# EAGLE board testing_jig (EAGLE 9.7.0)
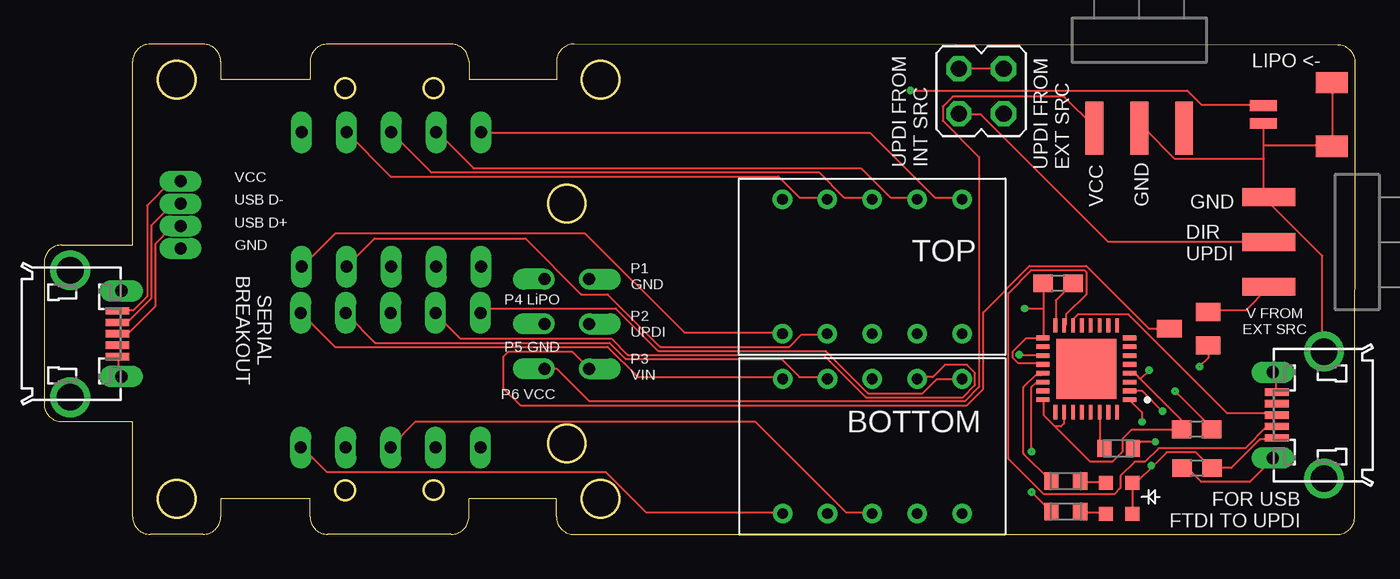
[diagram p0: board, top side]
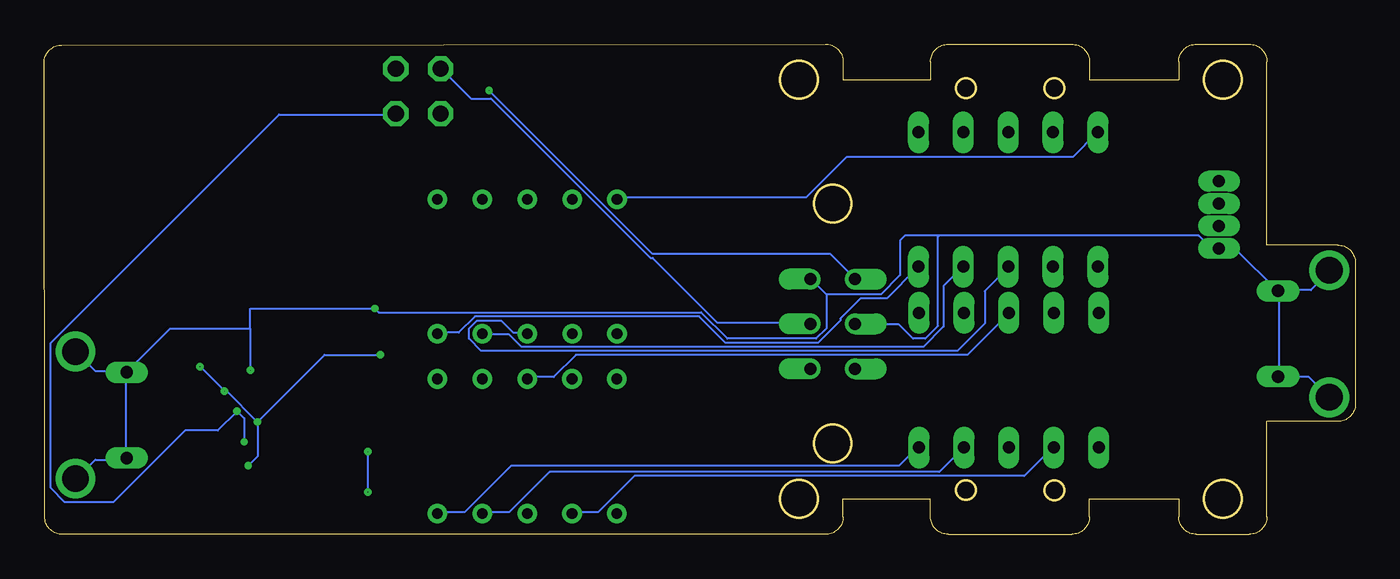
[diagram p1: board, bottom side, seen from below]

Size 74.22 x 27.77 mm. Coordinates in mm from the lower left corner, seen from the top.
Outline: 30,0 73.18,0 arc90 74.18,1 74.22,26.71 arc90 73.22,27.71 30,27.77 arc90 29,26.77 29,25.76 24.05,25.76 24.05,26.76 arc90 23.05,27.76 16.05,27.76 arc90 15.05,26.76 15.05,25.75 10,25.75 10,26.76 arc90 9,27.76 6,27.76 arc90 5,26.76 5,16.39 1,16.39 arc90 0,15.39 0,7.39 arc90 1,6.39 5,6.39 5,1.01 arc90 6,0.01 9,0.01 arc90 10,1.01 10,2.01 15.05,2.01 15.05,1.01 arc90 16.05,0.01 23.05,0.01 arc90 24.05,1.01 24.05,2.01 29,2.01 29,1 arc90 30,0
Outline: circle at 17.05,25.26 radius 0.55
Outline: circle at 29.58,5.15 radius 1.05
Outline: circle at 7.5,25.76 radius 1.05
Outline: circle at 31.5,25.76 radius 1.05
Outline: circle at 29.58,18.73 radius 1.05
Outline: circle at 31.5,2.01 radius 1.05
Outline: circle at 7.5,2.01 radius 1.05
Outline: circle at 22.05,2.51 radius 0.54
Outline: circle at 17.05,2.51 radius 0.55
Outline: circle at 22.05,25.26 radius 0.55
Copper layers (1*16): Top / Bottom
Stack-up Default Layer Stack: Top User Defined 0.035mm / Dielectric-1 User Defined 1.5mm / Bottom User Defined 0.035mm
Design rules "watch": minimum track width 4mil, minimum drill 0.008890625mm, track to track 5mil, track to pad 5mil, pad to pad 5mil, via to via 5mil, smd to smd 5mil, copper to edge 2.5mil, drill to drill 5mil, minimum pad ring 10mil, minimum via ring 8mil, stop-mask expansion 4mil, vias tented up to drill 0.008890625mm, thermal gap 10mil

## Footprints (pad centres in the part's own frame; a part is rotated, then mirrored left to right if it is on the bottom)
2_DIGIT_0.28" = drill 0.6: _1 -5.08,-3.81; _2 -2.54,-3.81; _3 0,-3.81; _4 2.54,-3.81; _5 5.08,-3.81; _6 5.08,3.81; _7 2.54,3.81; _8 0,3.81; _9 -2.54,3.81; _10 -5.08,3.81
0603CAP = smd 1.1 x 1: 1 -0.85,0; 2 0.85,0
3PIN__SMT_MALE = smd 1 x 3: 1 -2.54,5; 2 0,5; 3 2.54,5
SOT23 = smd 1 x 1.4: 1 -0.95,-1.1; 2 0.95,-1.1; 3 0,1.1
JST-SM02B-SRSS-TB = smd 0.6 x 1.55: 1 0.5,0; 2 -0.5,0 | smd 1.2 x 1.8: M1 1.8,3.875; M2 -1.8,3.875
RESC1608X60 = smd 0.799 x 0.974: 1 -0.815,0; 2 0.815,0
ZX62D-B-5PA8 = smd 1.35 x 0.4: 1 4.825,1.3; 2 4.825,0.65; 3 4.825,0; 4 4.825,-0.65; 5 4.825,-1.3 | drill 1.5: S1 2.15,-3.6; S2 2.15,3.6 | drill 0.7 long: S3 5.05,2.425; S4 5.05,-2.425
QFN50P500X500X90-33N = smd 0.81 x 0.27: 1 -2.45,1.75; 2 -2.45,1.25; 3 -2.45,0.75; 4 -2.45,0.25; 5 -2.45,-0.25; 6 -2.45,-0.75; 7 -2.45,-1.25; 8 -2.45,-1.75; 17 2.45,-1.75; 18 2.45,-1.25; 19 2.45,-0.75; 20 2.45,-0.25; 21 2.45,0.25; 22 2.45,0.75; 23 2.45,1.25; 24 2.45,1.75 | smd 0.27 x 0.81: 9 -1.75,-2.45; 10 -1.25,-2.45; 11 -0.75,-2.45; 12 -0.25,-2.45; 13 0.25,-2.45; 14 0.75,-2.45; 15 1.25,-2.45; 16 1.75,-2.45; 25 1.75,2.45; 26 1.25,2.45; 27 0.75,2.45; 28 0.25,2.45; 29 -0.25,2.45; 30 -0.75,2.45; 31 -1.25,2.45; 32 -1.75,2.45 | smd 3.4 x 3.4: 33 0,0
2X3-P50-E2-POGOPINS = drill 0.68 offset: 1 -2.54,2.54; 2 -2.54,0; 3 -2.54,-2.54; 4 0,2.54; 5 0,0; 6 0,-2.54
1X4-1.27-P50-E2-POGOPINS = drill 0.68 pad 0.812 long: P$1 0,1.905; P$2 0,0.635; P$3 0,-0.635; P$4 0,-1.905
0603_LED = smd 0.8 x 0.8: A 0,-0.75; C 0,0.75
2X2PIN_JUMPER = drill 0.914 octagon: 1 -1.27,-1.27; 2 -1.27,1.27; 3 1.27,-1.27; 4 1.27,1.27
2X0.28_LED_DISP_POGO_PIN_HARNESS = drill 0.68 pad 0.98 long: BOT1 -5.12,-10.24; BOT2 -2.58,-10.24; BOT3 -0.04,-10.24; BOT4 2.5,-10.24; BOT5 5.04,-10.24; BOT6 5.04,-2.62; BOT7 2.5,-2.62; BOT8 -0.04,-2.62; BOT9 -2.58,-2.62; BOT10 -5.12,-2.62; TOP1 -5.08,0; TOP2 -2.54,0; TOP3 0,0; TOP4 2.54,0; TOP5 5.08,0; TOP6 5.08,7.62; TOP7 2.54,7.62; TOP8 0,7.62; TOP9 -2.54,7.62; TOP10 -5.08,7.62

## Placement (x,y rotation side)
BOTTOM  0.28"-2DIGIT-7SEGEMNT  [2_DIGIT_0.28"]  46.88,5 0 top
C1  100nF  [0603CAP]  57.38,14.23 180 top
C2  100nF  [0603CAP]  65.23,5.96 180 top
C3  4.7uF  [0603CAP]  65.25,3.76 180 top
CLOCK_PCB_TEST_PAD_BREAKOUT  3PIN_SMT_MALE  [3PIN__SMT_MALE]  61.98,28 180 top
D2  BAS70-05  [SOT23]  64.78,11.65 90 top
DIRECT_UPDI_PROG_PINS  3PIN_SMT_MALE  [3PIN__SMT_MALE]  74.31,16.56 90 top
LIPO_BATT_IN_BREAKOUT  JST_SM02B-SRSS-TB  [JST-SM02B-SRSS-TB]  69.01,23.78 270 top
R1  270/330  [RESC1608X60]  57.82,1.29 0 top
R2  270/330  [RESC1608X60]  57.82,3.03 0 top
R3  4.7K  [RESC1608X60]  60.81,4.88 0 top
SERIAL  MICROUSB  [ZX62D-B-5PA8]  -0.68,11.37 0 top
TOP  0.28"-2DIGIT-7SEGEMNT  [2_DIGIT_0.28"]  46.87,15.18 0 top
U1  FT232RQ  [QFN50P500X500X90-33N]  58.99,9.38 180 top
U$1  2X3-P50-E2-POGOPINS  [2X3-P50-E2-POGOPINS]  30.85,11.93 0 top
U$2  1X4-1.27-P50-E2-POGOPINS  [1X4-1.27-P50-E2-POGOPINS]  7.72,18.1 0 top
U$3  0603_LED  [0603_LED]  60.84,1.18 90 top
U$4  0603_LED  [0603_LED]  60.84,2.92 90 top
U$5  2X2PIN_JUMPER  [2X2PIN_JUMPER]  53.04,25.1 180 top
U$6  2X0.28_LED_DISP_POGO_PIN_HARNESS  [2X0.28_LED_DISP_POGO_PIN_HARNESS]  19.65,15.16 0 top
UPDI  MICROUSB  [ZX62D-B-5PA8]  74.6,6.76 180 top

## Library data of the parts
BOTTOM C1-C3 LIPO_BATT_IN_BREAKOUT SERIAL TOP U$1-U$6 UPDI = MY_CLOCK_LIB_COMPONENTS
CLOCK_PCB_TEST_PAD_BREAKOUT DIRECT_UPDI_PROG_PINS = keyboard_lib
D2 = BAS_40_05
R1-R3 = MY_0603_RES; CATEGORY: Resistor; SUB-CATEGORY: Fixed
U1 = FT232RQ; A_MAX: 0.9; B_MAX: 0.3; B_MIN: 0.2; B_NOM: 0.25; D2_NOM: 3.4; D_MAX: 5.0; D_MIN: 5.0; D_NOM: 5.0; E2_NOM: 3.4; ENOM: 0.5; E_MAX: 5.0; E_MIN: 5.0; E_NOM: 5.0; L_MAX: 0.45; L_MIN: 0.35; L_NOM: 0.4; MANUFACTURER: FTDI; MAXIMUM_PACKAGE_HEIGHT: 0.9mm; PARTREV: 2.15; PIN_COUNT_D: 8.0; PIN_COUNT_E: 8.0; SNAPEDA_PACKAGE_ID: 71296; STANDARD: IPC 7351B

## Nets
3V3OUT: C1.1 U1.16
B1: BOTTOM._1 U$6.BOT1
B2: BOTTOM._2 U$6.BOT2
B3: BOTTOM._3 U$6.BOT3
B4: BOTTOM._4 U$6.BOT4
B5: BOTTOM._5 U$6.BOT5
B6: BOTTOM._6 U$6.BOT6
B7: BOTTOM._7 U$6.BOT7
B8: BOTTOM._8 U$6.BOT8
B9: BOTTOM._9 U$6.BOT9
B10: BOTTOM._10 U$6.BOT10
CBUS0: R1.1 U1.22
CBUS1: R2.1 U1.21
EXP: U1.33
GND: C1.2 C2.2 C3.2 CLOCK_PCB_TEST_PAD_BREAKOUT.2 DIRECT_UPDI_PROG_PINS.3 LIPO_BATT_IN_BREAKOUT.1 LIPO_BATT_IN_BREAKOUT.M1 LIPO_BATT_IN_BREAKOUT.M2 SERIAL.5 SERIAL.S1 SERIAL.S2 SERIAL.S3 SERIAL.S4 U1.4 U1.17 U1.20 U1.24 U1.26 U$1.2 U$1.4 U$2.P$4 UPDI.5 UPDI.S1 UPDI.S2 UPDI.S3 UPDI.S4
N$1: R1.2 U$3.C
N$2: R2.2 U$4.C
SER_USB_DM: SERIAL.2 U$2.P$2
SER_USB_DP: SERIAL.3 U$2.P$3
SER_VCC: SERIAL.1 U$2.P$1
T1: TOP._1 U$6.TOP1
T2: TOP._2 U$6.TOP2
T3: TOP._3 U$6.TOP3
T4: TOP._4 U$6.TOP4
T5: TOP._5 U$6.TOP5
T6: TOP._6 U$6.TOP6
T7: TOP._7 U$6.TOP7
T8: TOP._8 U$6.TOP8
T9: TOP._9 U$6.TOP9
T10: TOP._10 U$6.TOP10
TXD: R3.1 U1.30
UPDI: U$1.5 U$5.1 U$5.3
UPDI_DIR: DIRECT_UPDI_PROG_PINS.2 U$5.4
UPDI_PROG_DM: U1.15 UPDI.2
UPDI_PROG_DP: U1.14 UPDI.3
UPDI_TRANS: R3.2 U1.2 U$5.2
V_DIR: D2.2 DIRECT_UPDI_PROG_PINS.1
V_LIPO: LIPO_BATT_IN_BREAKOUT.2 U$1.1
V_USB: C2.1 C3.1 D2.1 U1.1 U1.19 U$3.A U$4.A UPDI.1
VCC: CLOCK_PCB_TEST_PAD_BREAKOUT.3 U$1.3
VIN: D2.3 U$1.6

## Tracks (layer width: path | path; a pad name or v marks a point on that pad's centre or on a via)
3V3OUT
  Top 0.102: U1.16 57.26,11.89 57.26,13.26 58.18,14.17 C1.1
B1
  Top 0.102: BOTTOM._1 41.72,1.26 34.06,1.26 31.77,3.54 16,3.54 14.63,4.92 U$6.BOT1
B2
  Bottom 0.102: BOTTOM._2 44.23,1.26 42.86,1.26 40.8,3.31 18.75,3.31 17.14,4.92 U$6.BOT2
B3
  Top 0.102: BOTTOM._3 46.86,1.26 45.38,1.26 40.23,6.4 21.03,6.4 19.66,5.03 U$6.BOT3
B4
  Bottom 0.102: BOTTOM._4 49.38,1.26 47.89,1.26 45.61,3.54 23.55,3.54 22.17,4.92 U$6.BOT4
B5
  Bottom 0.102: BOTTOM._5 51.89,1.26 50.41,1.26 47.78,3.89 25.83,3.89 24.8,4.92 U$6.BOT5
B6
  Top 0.102: BOTTOM._6 51.89,8.8 50.52,8.8 49.72,8 46.63,8 44.23,10.4 34.75,10.4 32.35,12.8 25.03,12.8 24.8,12.57 U$6.BOT6
B7
  Top 0.102: BOTTOM._7 49.49,8.91 50.29,8.91 50.98,9.6 52.23,9.6 52.69,9.14 52.69,8.46 52.01,7.77 46.52,7.77 44.12,10.17 33.03,10.17 32.12,11.09 23.55,11.09 22.17,12.46 U$6.BOT7
B8
  Bottom 0.102: BOTTOM._8 46.86,8.91 45.38,8.91 44.12,10.17 21.95,10.17 19.66,12.46 U$6.BOT8
B9
  Top 0.102: BOTTOM._9 44.23,8.91 42.75,8.91 41.72,9.94 32.92,9.94 32,10.86 18.75,10.86 17.14,12.46 U$6.BOT9
B10
  Top 0.102: BOTTOM._10 41.72,8.91 33.6,8.91 31.89,10.63 16.46,10.63 14.63,12.46 U$6.BOT10
CBUS0  (via drill 0.01)
  Top 0.102: v55.89,4.69 55.89,8.34 56.12,8.57 56.46,8.57 U1.22 | v55.89,2.4 56.92,1.37 R1.1
  Bottom 0.102: v55.89,2.4 v55.89,4.69
CBUS1
  Top 0.102: U1.21 56.46,9.03 56.12,9.03 55.44,8.34 55.44,4.57 56.92,3.09 R2.1
GND  (via drill 0.01)
  Top 0.102: LIPO_BATT_IN_BREAKOUT.M2 72.92,25.49 72.92,22.06 LIPO_BATT_IN_BREAKOUT.M1 72.81,22.06 69.04,22.06 | 69.04,21.26 69.04,19.43 69.27,19.2 DIRECT_UPDI_PROG_PINS.3 69.38,19.09 69.38,18.75 72.35,15.77 72.35,10.4 UPDI.S1 | 69.04,21.26 69.04,22.06 | 69.04,22.06 69.04,23.2 LIPO_BATT_IN_BREAKOUT.1 | 69.04,21.26 64.01,21.26 62.29,22.97 62.06,22.97 CLOCK_PCB_TEST_PAD_BREAKOUT.2 | C3.2 64.47,3.66 64.81,3.66 65.49,2.97 68.24,2.97 69.49,4.23 UPDI.S3 | 57.21,6.11 56.58,6.74 56.58,7.54 U1.24 | 57.21,6.11 57.55,6.11 57.72,6.28 57.72,6.86 U1.26 | 61.84,9.03 61.49,9.03 U1.4 61.84,9.03 | 62.05,8.81 64.35,6.51 64.35,6.06 C2.2 64.11,5.96 64.06,5.91 61.53,5.91 61.04,5.42 61.04,4.69 60.47,4.12 59.21,4.12 57.21,6.11 | 62.05,8.81 61.84,9.03 | U1.20 56.46,9.72 55.1,9.72 54.8,10.01 54.8,10.33 55.56,11.09 56.46,11.09 U1.17 56.58,11.2 56.58,12.8 | 56.58,12.8 56.58,14.17 C1.2 | UPDI.5 69.72,8.12 69.72,9.03 69.61,9.14 UPDI.S4 | v55.51,12.8 56.58,12.8 | v62.54,9.3 62.05,8.81 | SERIAL.5 4.23,10.06 4.23,9.14 4.34,9.03 SERIAL.S4
  Bottom 0.102: UPDI.S2 72.35,3.2 71.32,4.23 69.61,4.23 UPDI.S3 69.61,4.34 69.61,9.14 UPDI.S4 | UPDI.S4 69.61,9.26 71.32,9.26 72.35,10.29 UPDI.S1 | 62.54,11.66 67.09,11.66 69.49,9.26 UPDI.S4 | 62.54,11.66 62.54,12.8 v55.51,12.8 55.28,12.57 37.03,12.57 35.55,11.09 30.52,11.09 29.95,11.66 29.95,13.6 | 62.54,11.66 v62.54,9.3 | 29.95,13.6 26.86,13.6 25.78,14.69 25.78,16.64 25.5,16.92 23.56,16.92 | 29.95,13.6 30.75,14.4 U$1.4 | U$1.2 28.23,11.89 25.83,11.89 25.03,11.09 24.35,11.09 23.61,11.82 23.61,16.86 23.56,16.92 | SERIAL.S1 1.49,7.77 2.63,8.91 4.34,8.91 SERIAL.S4 4.34,9.03 4.34,13.72 SERIAL.S3 | SERIAL.S3 4.46,13.83 6.74,16.12 7.66,16.12 U$2.P$4 8.14,16.2 8.86,16.92 23.56,16.92 | SERIAL.S3 4.34,13.83 2.52,13.83 1.49,14.86 SERIAL.S2
N$1
  Top 0.102: U$3.C 60.01,1.26 58.75,1.26 R1.2
N$2
  Top 0.102: U$4.C 60.01,2.97 58.64,2.97 R2.2
SER_USB_DM
  Top 0.102: SERIAL.2 4.23,12.12 4.8,12.12 6.06,13.37 6.06,17.49 7.2,18.63 7.66,18.63 U$2.P$2
SER_USB_DP
  Top 0.102: SERIAL.3 4.23,11.43 4.8,11.43 6.29,12.92 6.29,16.46 7.2,17.37 7.66,17.37 U$2.P$3
SER_VCC
  Top 0.102: SERIAL.1 4.23,12.69 5.03,12.69 5.83,13.49 5.83,18.63 7.2,20 7.66,20 U$2.P$1
T1
  Top 0.102: TOP._1 41.72,11.43 36.23,11.43 30.6,17.07 16.49,17.07 14.63,15.2 U$6.TOP1
T2
  Top 0.102: TOP._2 44.23,11.32 42.86,11.32 42.18,10.63 34.86,10.63 31.89,13.6 30.4,13.6 27.24,16.76 18.7,16.76 17.14,15.2 U$6.TOP2
T3
  Bottom 0.102: TOP._3 46.98,11.43 47.66,11.43 48.35,12.12 49.72,12.12 50.18,11.66 50.18,11.09 49.49,10.4 22.52,10.4 20.97,11.95 20.97,13.78 19.66,15.09 U$6.TOP3
T4
  Bottom 0.102: TOP._4 49.38,11.32 47.89,11.32 47.21,10.63 24.46,10.63 23.31,11.78 23.31,14.06 22.29,15.09 U$6.TOP4
T5
  Bottom 0.102: TOP._5 51.89,11.43 50.75,11.43 49.84,12.34 37.15,12.34 35.66,10.86 30.4,10.86 29.15,12.12 29.15,12.23 28,13.37 26.52,13.37 24.8,15.09 U$6.TOP5
T6
  Top 0.102: TOP._6 51.89,19.09 50.41,19.09 46.75,22.75 24.8,22.75 U$6.TOP6
T7
  Top 0.102: TOP._7 49.38,19.09 47.89,19.09 46.24,20.74 24.3,20.74 22.29,22.75 U$6.TOP7
T8
  Top 0.102: TOP._8 46.86,19.09 45.26,19.09 43.84,20.51 21.9,20.51 19.66,22.75 U$6.TOP8
T9
  Top 0.102: TOP._9 44.23,19.09 42.75,19.09 41.56,20.28 19.61,20.28 17.14,22.75 U$6.TOP9
T10
  Bottom 0.102: TOP._10 41.72,19.09 31.09,19.09 28.8,21.37 16,21.37 14.63,22.75 U$6.TOP10
TXD
  Top 0.102: U1.30 59.78,6.86 59.78,5.03 59.89,4.92 R3.1
UPDI
  Top 0.102: U$5.1 54.29,26.4 51.78,26.4 U$5.3
  Bottom 0.102: U$1.5 30.86,12 36.12,12 39.78,15.66 39.89,15.66 48.92,24.69 50.06,24.69 51.66,26.29 U$5.3
UPDI_DIR
  Top 0.102: U$5.4 51.78,23.77 53.03,23.77 60.24,16.57 69.27,16.57 DIRECT_UPDI_PROG_PINS.2
UPDI_PROG_DM
  Top 0.102: U1.15 57.84,11.89 57.84,12.46 58.98,13.6 58.98,14.86 58.86,14.97 55.89,14.97 54.58,13.66 54.58,4.29 56.58,2.29 60.58,2.29 60.92,2.63 60.92,3.31 61.72,4.12 62.31,4.12 63.08,4.89 67.98,4.89 69.15,6.06 69.72,6.06 UPDI.2
UPDI_PROG_DP
  Top 0.102: U1.14 58.29,11.89 58.29,12.23 58.52,12.46 61.38,12.46 66.98,6.86 69.72,6.86 UPDI.3
UPDI_TRANS  (via drill 0.01)
  Top 0.102: U1.2 61.49,8.12 62.16,8.12 v63.3,6.98 | R3.2 61.72,4.92 62.05,5.24 v62.89,5.24
  Bottom 0.102: U$5.2 54.41,23.77 60.92,23.77 73.84,10.86 73.84,2.63 73.04,1.83 70.29,1.83 66.23,5.89 64.39,5.89 v63.3,6.98 62.89,6.57 v62.89,5.24
V_DIR
  Top 0.102: D2.2 65.95,12.69 68.01,12.69 69.27,13.95 DIRECT_UPDI_PROG_PINS.1
V_LIPO  (via drill 0.01)
  Top 0.102: v49.03,25.15 64.69,25.15 65.49,24.35 68.92,24.35 LIPO_BATT_IN_BREAKOUT.2
  Bottom 0.102: v49.03,25.15 39.78,15.89 29.72,15.89 28.35,14.52 U$1.1
V_USB  (via drill 0.01)
  Top 0.102: U$3.A 61.61,1.26 61.61,2.86 U$4.A 61.61,2.97 61.86,2.97 62.77,3.89 | UPDI.1 69.72,5.37 68.81,5.37 67.21,3.77 66.18,3.77 C3.1 66.06,3.77 65.18,4.66 63.54,4.66 62.77,3.89 | v55.19,10.17 56.46,10.17 U1.19 | U1.1 62.14,6.92 v62.14,6.37 | v64.01,8.12 66.06,6.06 C2.1 | D2.1 65.89,9.99 v65.4,9.5 | 62.77,3.89 v62.67,3.89
  Bottom 0.102: v55.19,10.17 58.34,10.17 v62.14,6.37 | v62.14,6.37 v62.15,6.37 63.89,8.12 v64.01,8.12 v65.39,9.5 v65.4,9.5 | v62.67,3.89 62.14,4.42 v62.14,6.37
VCC
  Top 0.102: U$1.3 28.35,9.37 29.04,9.37 30.87,7.54 52.12,7.54 52.92,8.34 52.92,21.37 50.86,23.43 50.86,24.23 51.44,24.8 57.72,24.8 59.44,23.09 CLOCK_PCB_TEST_PAD_BREAKOUT.3
VIN
  Top 0.102: D2.3 63.66,11.66 62.52,11.66 58.98,15.2 55.78,15.2 53.15,12.57 53.15,8.23 52.23,7.32 26.95,7.32 25.99,8.28 25.99,10.07 26.26,10.34 29.9,10.34 30.75,9.49 U$1.6

## Text on the board
tPlace: LIPO <- | VCC / USB D- / USB D+ / GND | UPDI FROM / INT SRC | UPDI FROM / EXT SRC | VCC | GND | GND | DIR / UPDI | P1 / GND | P4 LiPO | P2 / UPDI | SERIAL / BREAKOUT | P5 GND | V FROM / EXT SRC | P3 / VIN | P6 VCC | FOR USB / FTDI TO UPDI